# Altium PCB LBON2.PcbDoc
Units mm, origin at the board's own origin, x right, y up, seen from the top; angles counter-clockwise.
Board outline 109.88 x 107.21 mm, 2 copper layers (Top Layer, Bottom Layer); 6 components, 4 nets, 16 pads, 15 vias.
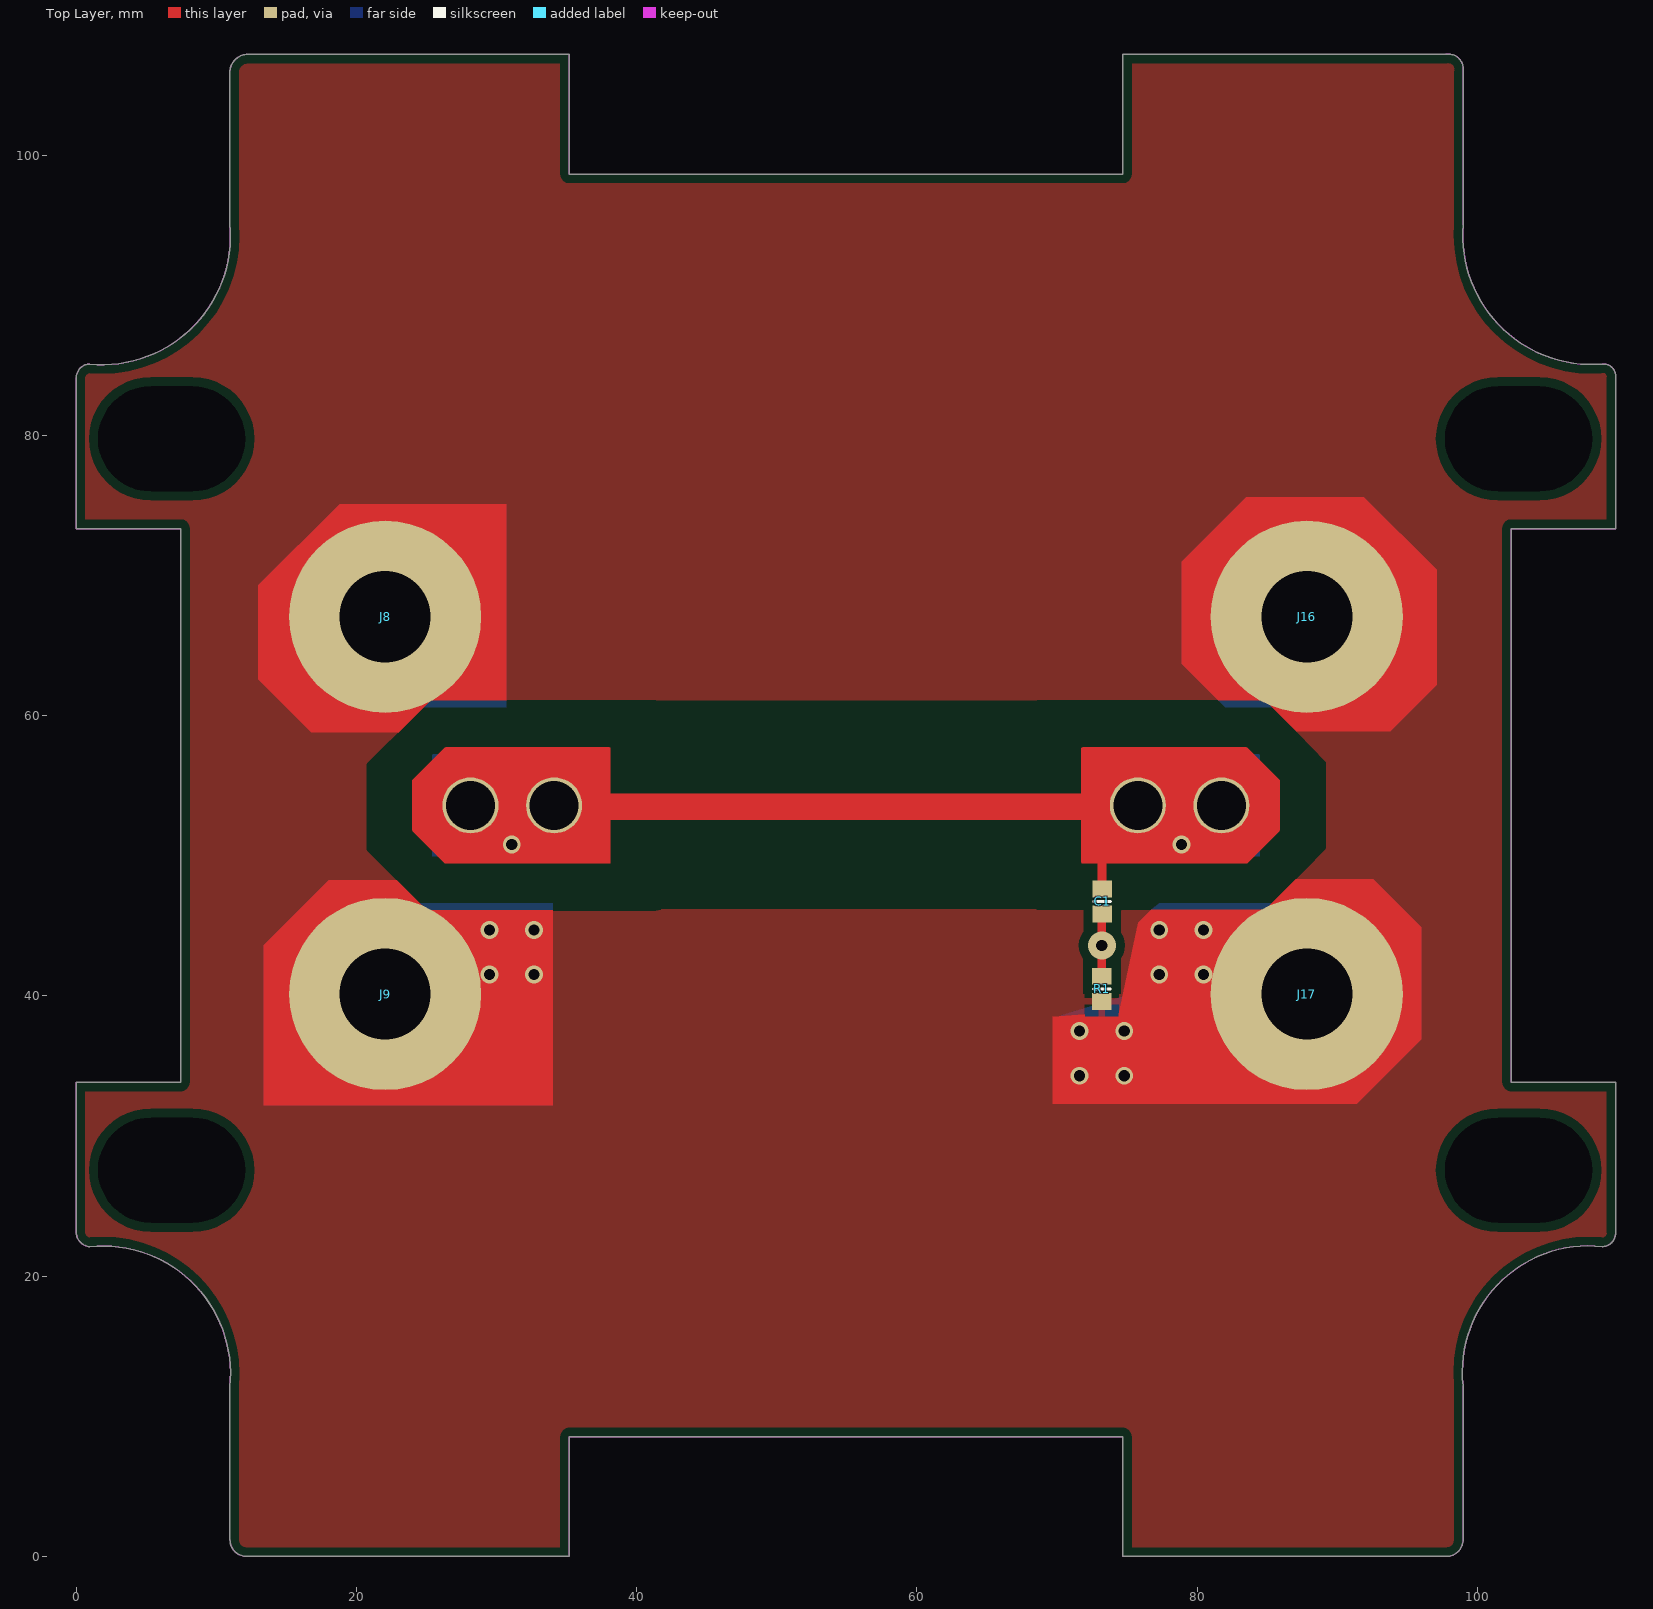
[diagram p0: Top Layer view]
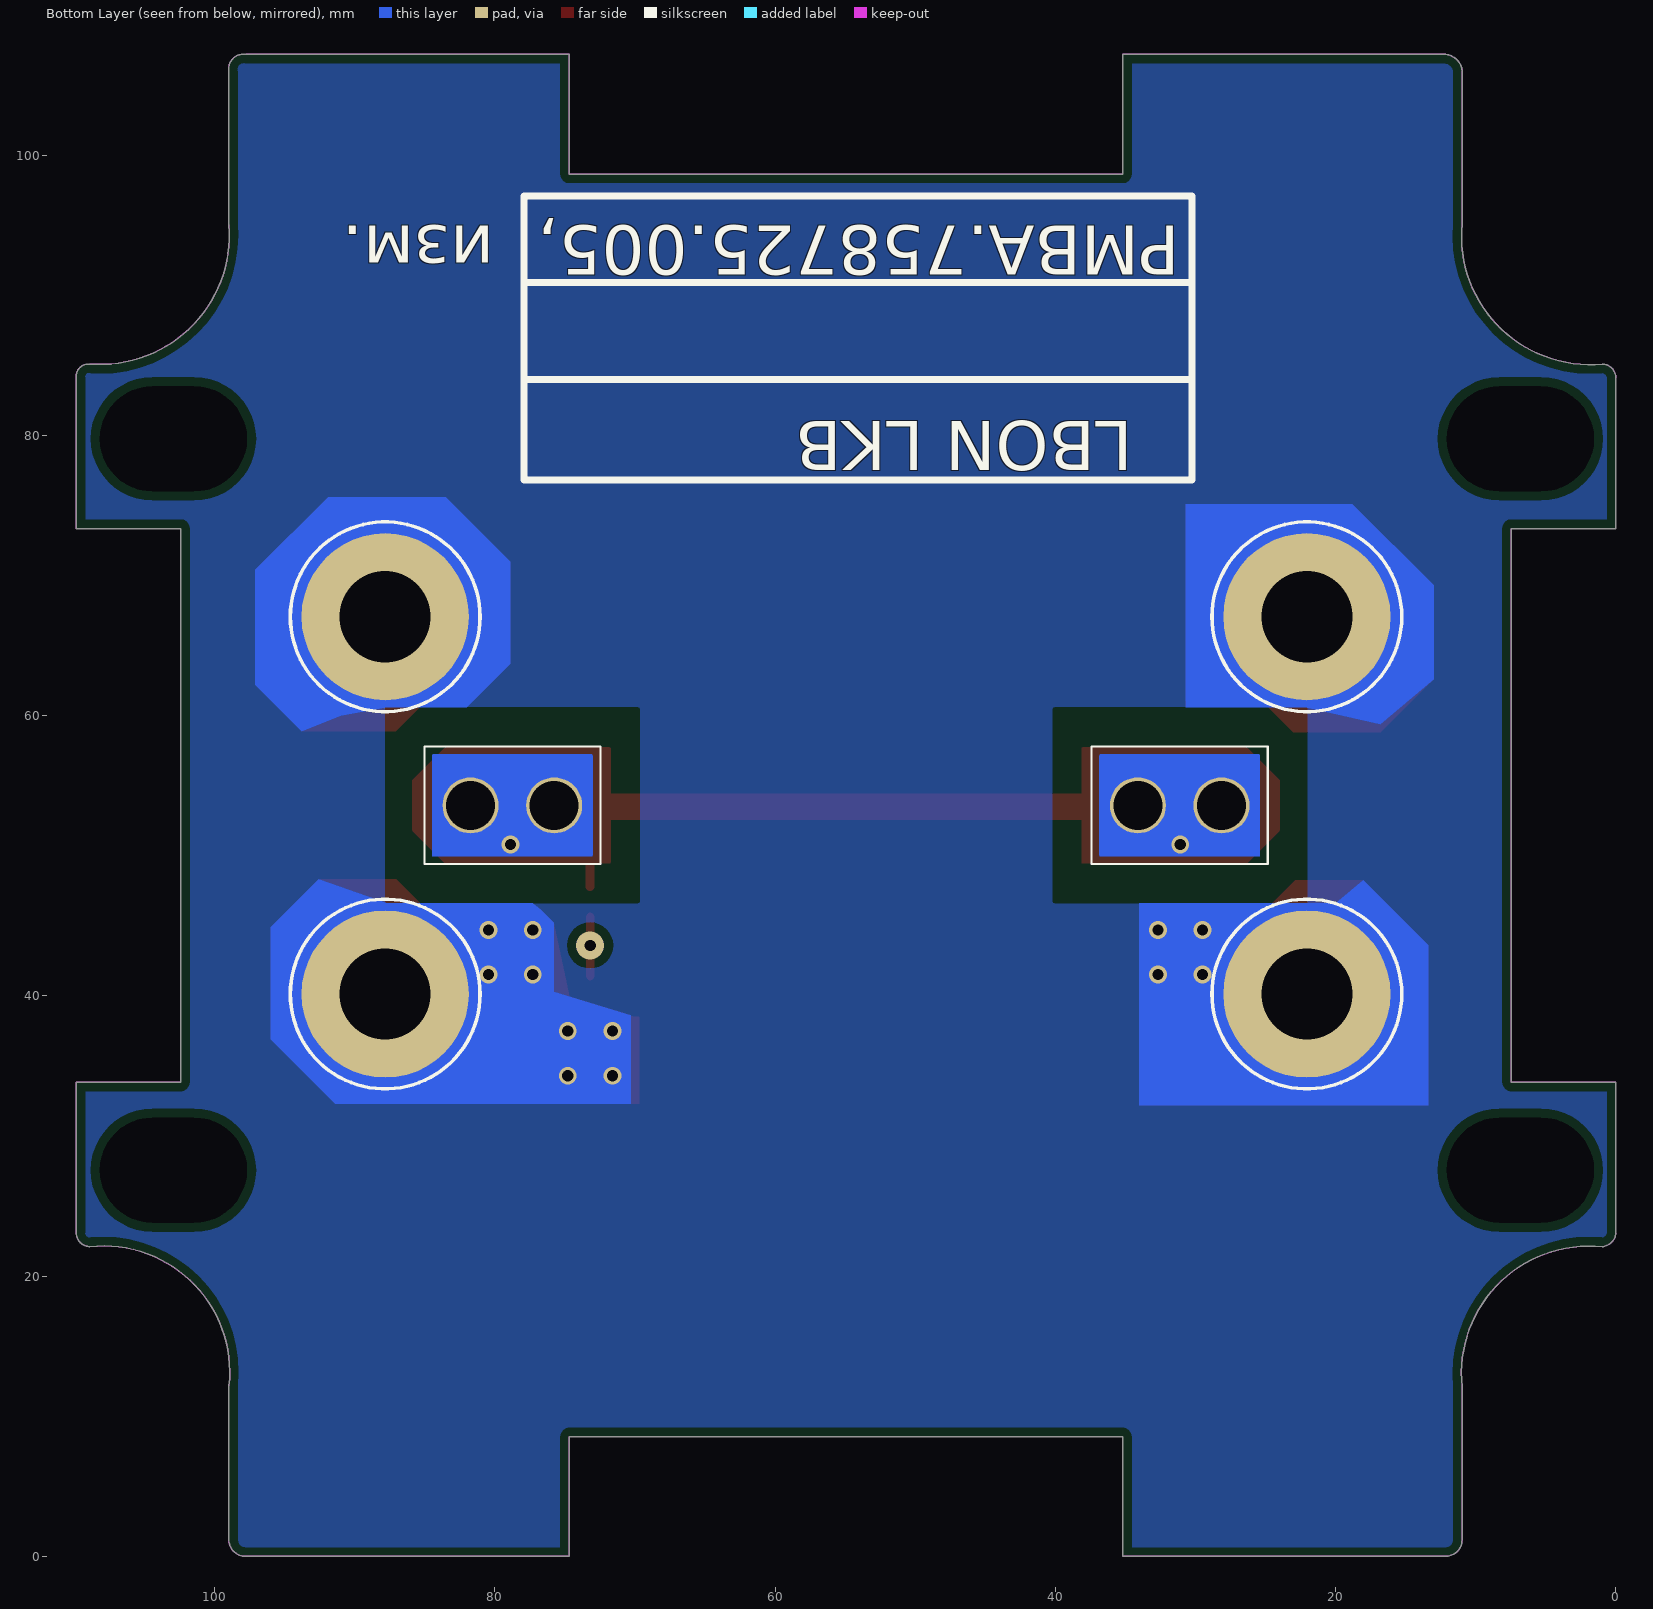
[diagram p1: Bottom Layer view, seen from below]

## Layer stack, top to bottom
Top Layer: signal copper 0.0356
Dielectric: dielectric 0.32, FR-4, Dk 4.8
Bottom Layer: signal copper 0.0356

## Board outline
0.001,23.063 ccw(c1.049,23.147) 0.966,22.098 cw(c1.901,13.025) 10.974,12.09 10.974,1.168 ccw(c12.141,1.168) 12.142,0 35.18,0 35.18,8.534 74.702,8.534 74.702,0 97.74,0 ccw(c97.812,1.173) 98.985,1.245 98.985,12.167 cw(c107.943,13.139) 108.916,22.098 ccw(c108.898,23.081) 109.881,23.063 109.881,33.833 102.414,33.833 102.414,73.355 109.881,73.355 109.881,84.125 ccw(c109.009,84.218) 108.916,85.09 cw(c108.188,94.293) 98.985,95.021 98.985,105.943 ccw(c97.947,106.15) 97.74,107.188 74.702,107.188 74.702,98.654 35.18,98.654 35.18,107.188 12.142,107.188 ccw(c12.24,105.922) 10.974,106.02 10.974,95.098 cw(c1.83,94.234) 0.966,85.09 ccw(c0.979,84.112) 0.001,84.125 0.001,73.355 7.468,73.355 7.468,33.833 0.001,33.833

## Design rules (kind name [scope] priority, off if disabled: settings)
Clearance Clearance_1 [OnLayer('TopLayer') And InNet('N44326') vs OnLayer('TopLayer')] p1: gap=1.016
Clearance [All] p2: gap=0.635
HoleSize [All] p1: absolutevalues=TRUE maxlimit=10 minlimit=0.025 maxpercent=80.000 minpercent=20.000
PlaneConnect [All] p1: planeconnectstyle=Relief reliefexpansion=1.016 reliefentries=4 reliefconductorwidth=1.016 reliefairgap=1.016
PolygonConnect [All] p1: connectstyle=Relief reliefconductorwidth=0.5 reliefentries=4 polygonreliefangle="90 Angle" airgapwidth=0.5
RoutingVias [All] p1: holewidth=0.711 width=1.27 viastyle="Through Hole" minholewidth=0.711 minwidth=1.27 maxholewidth=0.711 maxwidth=1.27
SilkToSolderMaskClearance SilkscreenOverComponentPads [IsPad] p1: minsilkscreentomaskgap=0.254 clearancetoexposedcopper=TRUE
SolderMaskExpansion [All] p1: expansion=0.254
Width [All] p1: maxlimit=8 minlimit=0.61 preferedwidth=0.61
25 further rules are at their usual default settings.

## Components (designator, comment, footprint, x,y, rotation, side; value= is the part's Value field where it differs from the comment)
C1 "10N" 6-0805_N 73.229,46.736 r90 top
J8 "CON1" VIA 22.048,67.056 r0 top
J9 "CON1" VIA 22.048,40.132 r0 top
J16 "CON1" VIA 87.834,67.056 r0 top
J17 "CON1" VIA 87.834,40.132 r0 top
R1 "75/50" 6-0805_N 73.2,40.5 r90 top

## Footprints (in the part's own frame and the unit in brackets; to place one, negate y for a bottom-side part, rotate by r counter-clockwise, add the part's x,y. Pads: shape width x height; smd on the part's side, far side on the other; paste and mask are expansions set on the pad)
6-0805_N [mm] "Chip Resistor, Body 2.0x1.2mm, IPC Medium Density"
  rect 1.2x1.4 smd: 1(-0.9,0) 2(0.9,0)
  silkscreen extent 0,-0.6 0,0.6, body extent -1.07,-0.7 1.07,0.7, height 0.7
VIA [mil]
  round 540 / inner round 60 / far side round 470 hole 255.91: 1(0,0)

## Part data
C1 R1: library part "Cap Semi", "Capacitor (Semiconductor SIM Model)"

## Free pads (board coordinates)
  round 0 hole 7.5 slot 10.5 at 0 deg: 1(6.808,27.559) 1(6.808,79.756) 1(102.947,27.559) 1(102.947,79.756)
  round 4 hole 3.5: 1(28.144,53.594) 1(81.738,53.594) 2(34.113,53.594) 2(75.769,53.594)

## Via types
v1: diameter 1.27, hole 0.8, Top Layer to Bottom Layer, tented top, 12 vias
v2: diameter 1.27, hole 0.8, Top Layer to Bottom Layer, 2 vias
v3: diameter 2, hole 0.8, Top Layer to Bottom Layer, 1 vias

## Nets (pads, with @x,y where several pads share a name; then routed paths per layer and width w, separated by ;. In a path a pad name is that pad's centre, name@x,y a point inside that pad or via, vN(x,y) a via of type N, cw(c..) or ccw(c..) an arc to the next point about the centre after c; other vN are vias at no path point)
GND: J8.1 J9.1 J16.1 J17.1 R1.1 | length 10.8
  Top Layer w0.61: J8.1@22.011,67.056 J8.1@22.022,67.056 ; J8.1@22.023,67.056 J8.1 ; J17.1@87.707,40.005 87.779,40.077 87.783,40.081 87.821,40.119 87.827,40.125 J17.1 J17.1@87.859,40.107
  Top Layer w1.016: J8.1@22.022,67.056 J8.1@22.012,67.06 ; J8.1 J8.1@22.099,67.056 ; J8.1@22.071,67 J8.1@22.023,66.98 ; J8.1@22.072,67 J8.1@22.076,67.002 ; J17.1@87.821,40.119 J17.1@87.835,40.105 ; J17.1@87.826,40.128 87.827,40.125 J17.1@87.835,40.105 ; J16.1@87.831,67.057 87.835,67.066 87.838,67.058 J16.1@87.839,67.056 ; J16.1@87.835,67.067 87.824,67.091 J16.1@87.839,67.076 ; J17.1@87.864,40.119 J17.1@87.859,40.109 ; J8.1@21.969,66.957 21.946,66.904 J8.1@22.023,66.98 ; J8.1@21.969,66.957 22.011,67.056 J8.1@22.012,67.06 ; J8.1@21.969,66.957 J8.1@22.023,66.98 ; J9.1@21.978,40.176 21.933,40.157 J9.1@22.002,40.157 ; J9.1@21.978,40.176 J9.1@21.992,40.182 ; J9.1@21.978,40.176 J9.1@21.998,40.168 ; J9.1@21.992,40.182 J9.1@21.998,40.168 ; J9.1@21.992,40.182 21.987,40.193 J9.1@21.997,40.183 ; J9.1@21.992,40.182 J9.1@21.997,40.183 ; J9.1@21.997,40.183 J9.1@22.023,40.157 ; J9.1@21.997,40.183 J9.1@22.023,40.194 ; J9.1@21.998,40.168 J9.1@22.002,40.157 ; J9.1@21.998,40.168 J9.1@22.023,40.157 ; J9.1@22.002,40.157 22.018,40.119 J9.1@22.023,40.109 ; J9.1@22.002,40.157 J9.1@22.023,40.157 ; J8.1@22.012,67.06 J8.1@22.014,67.064 ; J8.1@22.014,67.064 22.016,67.069 22.023,67.084 J8.1@22.023,67.056 ; J8.1@22.014,67.064 J8.1@22.023,67.056 ; J9.1@22.023,40.109 J9.1@22.023,40.157 ; J9.1@22.023,40.109 J9.1@22.031,40.089 ; J9.1@22.023,40.109 22.023,40.081 J9.1@22.031,40.089 ; J9.1@22.023,40.157 J9.1@22.099,40.157 ; J9.1@22.023,40.157 22.053,40.144 J9.1@22.076,40.135 ; J9.1@22.023,40.157 J9.1 J9.1@22.061,40.119 ; J9.1@22.023,40.157 J9.1@22.023,40.194 ; J9.1@22.023,40.194 22.213,40.272 J9.1@22.099,40.157 ; J8.1@22.023,66.98 J8.1@22.061,67.018 ; J8.1@22.023,66.98 J8.1@22.023,67.056 ; J9.1@22.031,40.089 J9.1@22.061,40.119 ; J9.1@22.061,40.119 J9.1@22.076,40.135 ; J8.1@22.061,67.018 J8.1@22.076,67.033 ; J8.1@22.061,67.018 22.023,67.055 22.044,67.047 J8.1@22.076,67.033 ; J8.1@22.061,67.018 J8.1@22.076,67.002 ; J9.1@22.076,40.135 J9.1@22.099,40.157 ; J8.1@22.076,67.002 J8.1@22.112,67.018 ; J8.1@22.076,67.033 J8.1@22.099,67.056 ; J8.1@22.076,67.033 J8.1@22.112,67.018 ; J8.1@22.099,67.056 22.203,67.056 J8.1@22.112,67.018 ; J16.1@87.785,66.947 J16.1@87.857,66.977 ; J16.1@87.785,66.947 87.755,66.875 J16.1@87.857,66.977 ; J16.1@87.785,66.947 87.831,67.056 J16.1 J16.1@87.839,67.056 ; J17.1@87.806,39.982 J17.1@87.859,40.005 ; J17.1@87.806,39.982 87.783,39.929 J17.1@87.859,40.005 ; J17.1@87.806,39.982 J17.1@87.836,40.053 ; J17.1@87.836,40.053 J17.1@87.859,40.043 ; J17.1@87.836,40.053 J17.1@87.847,40.079 ; J17.1@87.836,40.053 87.806,40.066 87.779,40.077 87.771,40.081 87.783,40.081 J17.1@87.846,40.081 ; J17.1@87.835,40.105 J17.1@87.851,40.089 ; J17.1@87.835,40.105 J17.1@87.846,40.081 ; J16.1@87.839,67.056 J16.1@87.859,67.056 ; J16.1@87.839,67.056 J16.1@87.859,67.008 ; J16.1@87.839,67.076 J16.1@87.859,67.056 ; J16.1@87.839,67.076 87.835,67.066 87.838,67.065 J16.1@87.859,67.056 ; J16.1@87.839,67.076 87.859,67.123 J16.1@87.859,67.056 ; J17.1@87.846,40.081 J17.1@87.848,40.081 ; J17.1@87.846,40.081 J17.1@87.847,40.079 ; J17.1@87.847,40.079 J17.1@87.859,40.049 ; J17.1@87.847,40.079 J17.1@87.848,40.081 ; J17.1@87.848,40.081 J17.1@87.859,40.081 ; J17.1@87.848,40.081 J17.1@87.851,40.089 ; J17.1@87.851,40.089 J17.1@87.859,40.081 ; J17.1@87.851,40.089 87.859,40.107 J17.1@87.859,40.109 ; J16.1@87.857,66.977 J16.1@87.859,66.978 ; J16.1@87.857,66.977 J16.1@87.859,66.98 ; J17.1@87.859,40.005 J17.1@87.859,40.043 ; J17.1@87.859,40.005 J17.1@87.875,40.012 ; J17.1@87.859,40.005 J17.1@87.872,40.018 ; J17.1@87.859,40.043 J17.1@87.859,40.049 ; J17.1@87.859,40.043 J17.1@87.862,40.042 ; J17.1@87.859,40.049 J17.1@87.859,40.081 ; J17.1@87.859,40.049 J17.1@87.862,40.042 ; J17.1@87.859,40.081 87.859,40.107 J17.1@87.859,40.109 ; J17.1@87.859,40.081 J17.1@87.936,40.081 ; J17.1@87.859,40.081 J17.1@87.898,40.043 ; J16.1@87.859,66.978 J16.1@87.859,66.98 ; J16.1@87.859,66.978 87.866,66.981 J16.1@87.87,66.983 ; J16.1@87.859,66.98 J16.1@87.859,67.008 ; J16.1@87.859,66.98 J16.1@87.868,66.988 ; J16.1@87.859,67.008 J16.1@87.859,67.056 ; J16.1@87.859,67.008 J16.1@87.868,66.988 ; J16.1@87.859,67.056 J16.1@87.913,67.033 ; J16.1@87.859,67.056 J16.1@87.936,67.056 ; J16.1@87.859,67.056 J16.1@87.898,67.018 ; J17.1@87.862,40.042 J17.1@87.886,40.032 ; J17.1@87.862,40.042 J17.1@87.872,40.018 ; J16.1@87.868,66.988 J16.1@87.898,67.018 ; J16.1@87.868,66.988 J16.1@87.87,66.983 ; J16.1@87.87,66.983 J16.1@87.914,67.001 ; J17.1@87.872,40.018 J17.1@87.886,40.032 ; J17.1@87.872,40.018 J17.1@87.875,40.012 ; J17.1@87.875,40.012 87.883,40.015 J17.1@87.904,40.024 ; J17.1@87.886,40.032 J17.1@87.904,40.024 ; J17.1@87.886,40.032 J17.1@87.898,40.043 ; J17.1@87.898,40.043 J17.1@87.936,40.081 ; J17.1@87.898,40.043 J17.1@87.913,40.028 ; J16.1@87.898,67.018 J16.1@87.914,67.001 ; J16.1@87.898,67.018 J16.1@87.913,67.033 ; J17.1@87.904,40.024 J17.1@87.913,40.028 ; J17.1@87.904,40.024 87.926,40.015 J17.1@87.913,40.028 ; J17.1@87.913,40.028 88.04,40.081 J17.1@87.936,40.081 ; J16.1@87.913,67.033 J16.1@87.951,67.017 ; J16.1@87.913,67.033 J16.1@87.936,67.056 ; J16.1@87.914,67.001 J16.1@87.951,67.017 ; J16.1@87.936,67.056 88.044,67.056 J16.1@87.951,67.017
  Bottom Layer w1.016: J8.1@22.026,67.065 J8.1@22.023,67.056 ; J16.1 J16.1@87.843,67.056 ; J16.1@87.838,67.065 J16.1@87.84,67.064 ; J9.1@21.969,40.058 22.007,40.149 J9.1@22.009,40.153 ; J9.1@21.969,40.058 J9.1@22.023,40.081 ; J9.1@21.969,40.058 21.946,40.005 J9.1@22.023,40.081 ; J8.1@21.979,67.07 J8.1@22.012,67.056 ; J8.1@21.979,67.07 J8.1@21.985,67.056 ; J8.1@21.979,67.07 21.957,67.121 J8.1@22.023,67.056 ; J8.1@21.983,66.963 J8.1@22.018,66.978 ; J8.1@21.983,66.963 21.967,66.924 J8.1@22.019,66.976 ; J8.1@21.983,66.963 J8.1@22.004,67.011 ; J8.1@21.985,67.056 21.994,67.033 J8.1@22.004,67.011 ; J8.1@21.985,67.056 J8.1@22.012,67.056 ; J9.1@22.003,40.166 J9.1@22.012,40.162 ; J9.1@22.003,40.166 J9.1@22.007,40.157 ; J9.1@22.003,40.166 21.995,40.185 J9.1@22.014,40.166 ; J8.1@22.004,67.011 J8.1@22.021,67.052 ; J8.1@22.004,67.011 J8.1@22.018,66.978 ; J9.1@22.007,40.157 J9.1@22.009,40.153 ; J9.1@22.007,40.157 J9.1@22.011,40.157 ; J9.1@22.009,40.153 22.022,40.121 J9.1@22.023,40.119 ; J9.1@22.009,40.153 J9.1@22.011,40.157 ; J9.1@22.011,40.157 J9.1@22.012,40.162 ; J9.1@22.011,40.157 J9.1@22.023,40.157 ; J8.1@22.012,67.056 J8.1@22.021,67.052 ; J8.1@22.012,67.056 J8.1@22.023,67.056 ; J9.1@22.012,40.162 J9.1@22.023,40.157 ; J9.1@22.012,40.162 J9.1@22.014,40.166 ; J9.1@22.014,40.166 J9.1@22.023,40.157 ; J9.1@22.014,40.166 22.023,40.186 J9.1@22.023,40.157 ; J8.1@22.018,66.978 J8.1@22.023,66.98 ; J8.1@22.018,66.978 J8.1@22.019,66.976 ; J8.1@22.019,66.976 J8.1@22.023,66.98 ; J8.1@22.019,66.976 22.023,66.966 J8.1@22.023,66.98 ; J8.1@22.021,67.052 J8.1@22.023,67.051 ; J8.1@22.021,67.052 J8.1@22.023,67.056 ; J9.1@22.023,40.081 J9.1@22.036,40.087 ; J9.1@22.023,40.081 J9.1@22.034,40.092 ; J9.1@22.023,40.081 J9.1@22.023,40.119 ; J9.1@22.023,40.119 J9.1@22.023,40.157 ; J9.1@22.023,40.119 J9.1@22.034,40.092 ; J9.1@22.023,40.157 J9.1@22.099,40.157 ; J9.1@22.023,40.157 22.053,40.144 J9.1@22.076,40.135 ; J9.1@22.023,40.157 J9.1 J9.1@22.061,40.119 ; J8.1@22.023,66.98 22.072,67.001 J8.1@22.076,67.002 ; J8.1@22.023,66.98 J8.1@22.061,67.018 ; J8.1@22.023,66.98 J8.1@22.023,67.051 ; J8.1@22.023,67.051 J8.1@22.023,67.056 ; J8.1@22.023,67.051 J8.1@22.031,67.048 ; J8.1@22.023,67.056 J8.1@22.031,67.048 ; J8.1@22.023,67.056 J8.1 J8.1@22.099,67.056 ; J8.1@22.031,67.048 22.042,67.043 J8.1@22.073,67.03 ; J8.1@22.031,67.048 J8.1@22.061,67.018 ; J9.1@22.034,40.092 J9.1@22.061,40.119 ; J9.1@22.034,40.092 J9.1@22.036,40.087 ; J9.1@22.036,40.087 22.062,40.098 J9.1@22.076,40.104 ; J9.1@22.061,40.119 J9.1@22.076,40.135 ; J9.1@22.061,40.119 J9.1@22.076,40.104 ; J8.1@22.061,67.018 J8.1@22.073,67.03 ; J8.1@22.061,67.018 J8.1@22.076,67.002 ; J8.1@22.073,67.03 J8.1@22.099,67.056 ; J8.1@22.073,67.03 J8.1@22.107,67.016 ; J9.1@22.076,40.104 J9.1@22.113,40.119 ; J9.1@22.076,40.135 J9.1@22.113,40.119 ; J9.1@22.076,40.135 J9.1@22.099,40.157 ; J8.1@22.076,67.002 J8.1@22.107,67.016 ; J9.1@22.099,40.157 22.203,40.157 J9.1@22.113,40.119 ; J8.1@22.099,67.056 22.203,67.056 J8.1@22.107,67.016 ; J17.1@87.744,40.065 87.727,40.025 J17.1@87.783,40.081 ; J17.1@87.744,40.065 J17.1@87.77,40.126 ; J17.1@87.744,40.065 J17.1@87.783,40.081 ; J17.1@87.751,40.171 J17.1@87.757,40.157 ; J17.1@87.751,40.171 87.738,40.203 J17.1@87.783,40.157 ; J17.1@87.751,40.171 J17.1@87.783,40.157 ; J17.1@87.757,40.157 J17.1@87.77,40.126 ; J17.1@87.757,40.157 J17.1@87.783,40.157 ; J17.1@87.77,40.126 87.782,40.154 J17.1@87.783,40.157 ; J17.1@87.77,40.126 87.778,40.108 J17.1@87.783,40.095 ; J17.1@87.783,40.081 J17.1@87.783,40.095 ; J17.1@87.783,40.081 J17.1@87.788,40.083 ; J17.1@87.783,40.081 J17.1@87.787,40.085 ; J17.1@87.783,40.095 J17.1@87.783,40.157 ; J17.1@87.783,40.095 J17.1@87.787,40.085 ; J17.1@87.783,40.157 J17.1@87.859,40.157 ; J17.1@87.783,40.157 87.835,40.135 J17.1@87.837,40.135 ; J17.1@87.783,40.157 J17.1@87.821,40.119 ; J17.1@87.787,40.085 J17.1@87.788,40.083 ; J17.1@87.787,40.085 J17.1@87.821,40.119 ; J17.1@87.788,40.083 J17.1@87.837,40.104 ; J16.1@87.807,66.958 87.785,66.905 J16.1@87.859,66.98 ; J16.1@87.807,66.958 J16.1@87.846,67.049 ; J16.1@87.807,66.958 J16.1@87.859,66.98 ; J17.1@87.821,40.119 J17.1@87.837,40.104 ; J17.1@87.821,40.119 J17.1 J17.1@87.837,40.135 ; J17.1@87.837,40.104 87.845,40.107 J17.1@87.873,40.119 ; J17.1@87.837,40.135 J17.1@87.873,40.119 ; J17.1@87.837,40.135 J17.1@87.859,40.157 ; J16.1@87.84,67.064 87.842,67.059 J16.1@87.843,67.056 ; J16.1@87.84,67.064 87.832,67.084 J16.1@87.852,67.063 ; J16.1@87.84,67.064 J16.1@87.851,67.06 ; J16.1@87.843,67.056 J16.1@87.846,67.049 ; J16.1@87.843,67.056 J16.1@87.849,67.056 ; J16.1@87.846,67.049 87.847,67.051 J16.1@87.849,67.056 ; J16.1@87.846,67.049 J16.1@87.859,67.018 ; J16.1@87.849,67.056 J16.1@87.851,67.06 ; J16.1@87.849,67.056 J16.1@87.859,67.056 ; J16.1@87.851,67.06 J16.1@87.852,67.063 ; J16.1@87.851,67.06 J16.1@87.859,67.056 ; J16.1@87.852,67.063 87.859,67.081 J16.1@87.859,67.056 ; J16.1@87.852,67.063 J16.1@87.859,67.056 ; J17.1@87.859,40.157 87.963,40.157 J17.1@87.873,40.119 ; J16.1@87.859,66.98 J16.1@87.859,67.018 ; J16.1@87.859,66.98 87.865,66.982 J16.1@87.873,66.986 ; J16.1@87.859,66.98 J16.1@87.871,66.991 ; J16.1@87.859,67.018 J16.1@87.859,67.056 ; J16.1@87.859,67.018 J16.1@87.871,66.991 ; J16.1@87.859,67.056 J16.1@87.913,67.033 ; J16.1@87.859,67.056 J16.1@87.936,67.056 ; J16.1@87.859,67.056 J16.1@87.898,67.018 ; J16.1@87.871,66.991 J16.1@87.898,67.018 ; J16.1@87.871,66.991 J16.1@87.873,66.986 ; J16.1@87.873,66.986 J16.1@87.913,67.002 ; J16.1@87.898,67.018 J16.1@87.913,67.033 ; J16.1@87.898,67.018 J16.1@87.913,67.002 ; J16.1@87.913,67.002 J16.1@87.949,67.018 ; J16.1@87.913,67.033 J16.1@87.949,67.018 ; J16.1@87.913,67.033 J16.1@87.936,67.056 ; J16.1@87.936,67.056 88.039,67.056 J16.1@87.949,67.018
  other v1: 71.6,34.3 74.8,34.3 71.6,37.5 74.8,37.5 29.503,41.529 32.678,41.529 77.293,41.529 80.468,41.529 29.503,44.704 32.678,44.704 77.293,44.704 80.468,44.704
N21691: C1.2 pad.1@28.144,53.594 pad.1@81.738,53.594 pad.2 | length 47.3
  Top Layer w0.61: pad.2@34.113,53.594 34.215,53.492 pad.2@34.291,53.492 ; pad.1@81.128,53.594 pad.1@81.154,53.569
  Top Layer w0.64: C1.2@73.229,47.803 73.229,53.416
  Top Layer w1.905: pad.2@34.291,53.492 pad.2@75.769,53.492
  other v2: 31.09,50.8 78.881,50.8
N44326: C1.1 R1.2 | length 4.2
  Top Layer w0.61: R1.2@73.204,41.4 C1.1@73.204,45.644
  other v3: 73.204,43.6
N44353: 

## Polygon pours and split planes (outlines as drawn)
no net on Bottom Solder "481" (hatched Horizontal grid 0.025 track 0.025, pour order 0): 72.975,57.277 84.583,57.277 84.583,49.936 72.975,49.936
no net on Bottom Solder "481" (hatched Horizontal grid 0.025 track 0.025, pour order 0): 25.35,57.277 36.958,57.277 36.958,49.936 25.35,49.936
no net on Top Solder "457" (hatched Horizontal grid 0.254 track 0.254, pour order 0): 26.341,57.696 38.05,57.696 38.05,49.53 26.341,49.53 24.004,51.915 24.004,55.363
no net on Top Solder "457" (hatched Horizontal grid 0.254 track 0.254, pour order 0): 83.516,57.696 71.764,57.696 71.764,49.53 83.516,49.53 85.861,51.915 85.861,55.363
GND on Top Layer "Top Layer-GND" (solid, pour order 9): 0.001,23.063 ccw(c1.049,23.147) 0.966,22.098 cw(c1.901,13.025) 10.974,12.09 10.974,1.168 ccw(c12.141,1.168) 12.142,0 35.18,0 35.18,8.534 74.702,8.534 74.702,0 97.74,0 ccw(c97.812,1.173) 98.985,1.245 98.985,12.167 cw(c107.943,13.139) 108.916,22.098 ccw(c108.898,23.081) 109.881,23.063 109.881,33.833 102.414,33.833 102.414,73.355 109.881,73.355 109.881,84.125 ccw(c109.009,84.218) 108.916,85.09 cw(c108.188,94.293) 98.985,95.021 98.985,105.943 ccw(c97.947,106.15) 97.74,107.188 74.702,107.188 74.702,98.654 35.18,98.654 35.18,107.188 12.142,107.188 ccw(c12.24,105.922) 10.974,106.02 10.974,95.098 cw(c1.83,94.234) 0.966,85.09 ccw(c0.979,84.112) 0.001,84.125 0.001,73.355 7.468,73.355 7.468,33.833 0.001,33.833
GND on Bottom Layer "Bottom Layer-GND" (solid, pour order 10): 0.001,23.063 ccw(c1.049,23.147) 0.966,22.098 cw(c1.901,13.025) 10.974,12.09 10.974,1.168 ccw(c12.141,1.168) 12.142,0 35.18,0 35.18,8.534 74.702,8.534 74.702,0 97.74,0 ccw(c97.812,1.173) 98.985,1.245 98.985,12.167 cw(c107.943,13.139) 108.916,22.098 ccw(c108.898,23.081) 109.881,23.063 109.881,33.833 102.414,33.833 102.414,73.355 109.881,73.355 109.881,84.125 ccw(c109.009,84.218) 108.916,85.09 cw(c108.188,94.293) 98.985,95.021 98.985,105.943 ccw(c97.947,106.15) 97.74,107.188 74.702,107.188 74.702,98.654 35.18,98.654 35.18,107.188 12.142,107.188 ccw(c12.24,105.922) 10.974,106.02 10.974,95.098 cw(c1.83,94.234) 0.966,85.09 ccw(c0.979,84.112) 0.001,84.125 0.001,73.355 7.468,73.355 7.468,33.833 0.001,33.833

## Keep-outs
Keep-Out Layer:
  the board outline again, w0.025

## Other copper
Top Layer:
  region net GND: 76.724,46.155 84.877,46.155 87.055,48.333 92.567,48.333 96,44.9 96,36.9 91.4,32.3 69.7,32.3 69.7,38.5 72,38.675 72,38.5 72.95,38.5 74.4,38.5 74.4,38.675 75.8,45.231
  region net GND: 87.062,58.874 84.85,61.086 81.514,61.086 78.9,63.7 78.9,71 83.5,75.6 91.9,75.6 97.1,70.4 97.1,62.2 93.774,58.874
  region net GND: 23.018,58.822 25.293,61.097 30.697,61.097 30.7,61.1 30.7,75.1 18.8,75.1 13,69.3 13,62.6 16.778,58.822
  region net GND: 22.891,48.239 25.03,46.1 34,46.1 34,32.2 13.4,32.2 13.4,43.6 18.039,48.239
  pour cut-out: 25.35,61.097 41.352,61.097 41.86,61.074 41.733,46.139 41.352,46.091 25.096,46.091 24.999,46.131 20.782,50.347 20.771,50.376 20.742,50.444 20.742,56.49 20.782,56.587 25.253,61.057 25.35,61.097
  pour cut-out: 84.874,61.086 84.875,61.086 84.922,61.065 84.97,61.046 84.97,61.044 84.971,61.044 89.152,56.703 89.171,56.656 89.191,56.608 89.191,50.566 89.171,50.518 89.151,50.47 84.959,46.196 84.958,46.195 84.91,46.175 84.862,46.154 84.861,46.155 84.86,46.154 68.587,46.155 68.537,46.176 41.489,46.228 41.449,61.057 68.587,61.085 84.872,61.086
  region net N21691: 71.774,57.716 71.75,57.658 71.75,49.53 71.774,49.472 71.832,49.448 83.516,49.448 83.574,49.472 85.86,51.758 85.884,51.816 85.884,55.372 85.86,55.43 83.574,57.716 83.516,57.74 71.832,57.74
  region net N21691: 38.108,49.472 38.132,49.53 38.132,57.658 38.108,57.716 38.05,57.74 26.366,57.74 26.308,57.716 24.022,55.43 23.998,55.372 23.998,51.816 24.022,51.758 26.308,49.472 26.366,49.448 38.05,49.448
Bottom Layer:
  region net GND: 76.724,46.155 77.3,46.6 87.682,46.599 92.567,48.333 96,44.9 96,36.9 91.4,32.3 70.3,32.3 70.3,38.6 75.8,40.3 75.8,45.231
  region net GND: 91,60 87.682,60.589 82,60.6 81.514,61.086 78.9,63.7 78.9,71 83.5,75.6 91.9,75.6 97.1,70.4 97.1,62.2 93.774,58.874
  region net GND: 22.175,60.589 30.5,60.6 30.7,60.6 30.7,75.1 18.8,75.1 13,69.3 13,62.6 16.8,59.4
  region net GND: 20,46.6 34,46.6 34,32.2 13.4,32.2 13.4,43.6 18.039,48.239
  pour cut-out: 40.154,60.549 40.194,60.452 40.194,46.736 40.154,46.639 40.057,46.599 22.175,46.599 22.078,46.639 22.038,46.736 22.038,60.452 22.078,60.549 22.175,60.589 40.057,60.589
  pour cut-out: 87.779,60.549 87.819,60.452 87.819,46.736 87.779,46.639 87.682,46.599 69.8,46.599 69.703,46.639 69.663,46.736 69.663,60.452 69.703,60.549 69.8,60.589 87.682,60.589
  region net N21691: 73.044,57.208 73.02,57.15 73.02,50.038 73.044,49.98 73.102,49.956 84.405,49.956 84.463,49.98 84.487,50.038 84.487,57.15 84.463,57.208 84.405,57.232 73.102,57.232
  region net N21691: 36.838,49.98 36.862,50.038 36.862,57.15 36.838,57.208 36.78,57.232 25.477,57.232 25.419,57.208 25.395,57.15 25.395,50.038 25.419,49.98 25.477,49.956 36.78,49.956

## Silkscreen, mask and mechanical layers (free items; w line width, h text height)
Bottom Overlay:
  circle w0.254: c22.048,40.132 r6.77
  circle w0.254: c22.048,67.056 r6.77
  circle w0.254: c87.834,67.056 r6.77
  circle w0.254: c87.834,40.132 r6.77
  lines w0.15: 24.842,49.403 37.415,49.403 37.415,57.785 24.842,57.785 24.842,49.403 ; 72.467,49.403 72.467,57.785 85.04,57.785 85.04,49.403 72.467,49.403
  lines w0.5: 30.263,83.977 77.928,83.977 ; 30.263,90.902 77.928,90.902 ; 30.263,76.835 30.263,97.102 77.928,97.102 77.928,76.835 30.263,76.835
  text "РМВА.758725.005,  изм." at 31.138,96.102 h6 r180
  text "LBON LKB" at 34.494,82.169 h6 r180
Bottom Solder:
  rectangle: 70.707,33.371 75.707,38.371
  rectangle: 76.4,40.6 81.4,45.6
  rectangle: 28.6,40.6 33.6,45.6
  lines w0.152: 25.35,49.911 25.35,57.277 36.907,57.277 36.907,49.911 25.35,49.911 ; 72.975,49.911 84.532,49.911 84.532,57.277 72.975,57.277 72.975,49.911
Mechanical 2:
  lines w0.152: 25.172,49.708 37.136,49.708 37.136,57.48 25.172,57.48 25.172,49.708 ; 72.746,49.708 72.746,57.48 84.71,57.48 84.71,49.708 72.746,49.708
  lines w0.203: 25.553,53.594 27.687,53.594 ; 34.621,53.594 36.755,53.594 ; 73.127,53.594 75.261,53.594 ; 82.195,53.594 84.329,53.594
Mechanical 4:
  lines w0.025: -3.86,60.3 113.996,60.3 ; -1.955,27.559 114.123,27.559 ; -0.075,46.863 117.908,46.863 ; 7.672,92.964 108.256,92.964 ; 14.225,101.625 40.819,75.032 ; 26.874,32.766 26.874,33.02 ; 31.116,35.814 31.116,53.594 ; 33.478,32.258 36.526,32.258 ; 39.701,75.006 55.005,75.006 ; 44.146,-0.889 44.146,109.728 ; 46.33,79.807 61.951,79.807 ; 47.677,81.026 63.907,81.026 ; 48.286,16.434 48.286,87.681 ; 54.941,32.182 71.769,32.182 ; 56.744,20.752 56.744,86.995 ; 61.621,-7.95 61.621,84.557 ; 61.901,79.807 63.983,79.807 ; 63.196,9.906 63.196,114.3 ; 64.339,36.881 88.19,13.03 ; 75.82,42.443 96.368,21.895 ; 78.766,43.053 78.766,77.47 ; 27.839,70.688 27.839,70.79 27.89,70.79 27.89,70.688 27.839,70.688
  lines w0.254: 31.09,43.116 31.09,50.8 ; 73.204,35.916 73.204,43.6 ; 78.881,43.116 78.881,50.8 ; 29.503,41.529 32.678,41.529 ; 29.503,41.529 29.503,44.704 ; 29.503,41.529 32.678,44.704 ; 29.503,44.704 32.678,41.529 ; 29.503,44.704 32.678,44.704 ; 32.678,41.529 32.678,44.704 ; 71.616,34.329 74.791,34.329 ; 71.616,34.329 71.616,37.504 ; 71.616,34.329 74.791,37.504 ; 71.616,37.504 74.791,34.329 ; 71.616,37.504 74.791,37.504 ; 74.791,34.329 74.791,37.504 ; 77.293,41.529 80.468,44.704 ; 77.293,41.529 77.293,44.704 ; 77.293,41.529 80.468,41.529 ; 77.293,44.704 80.468,44.704 ; 77.293,44.704 80.468,41.529 ; 80.468,41.529 80.468,44.704